# Altium PCB DDR3_SODIMM.PcbDoc
Units mm, origin at the board's own origin, x right, y up, seen from the top; angles counter-clockwise.
Board outline 68 x 30 mm, 2 copper layers (L1, L2), stack 1.595 mm thick; 1 components, 0 nets, 206 pads, 0 vias.
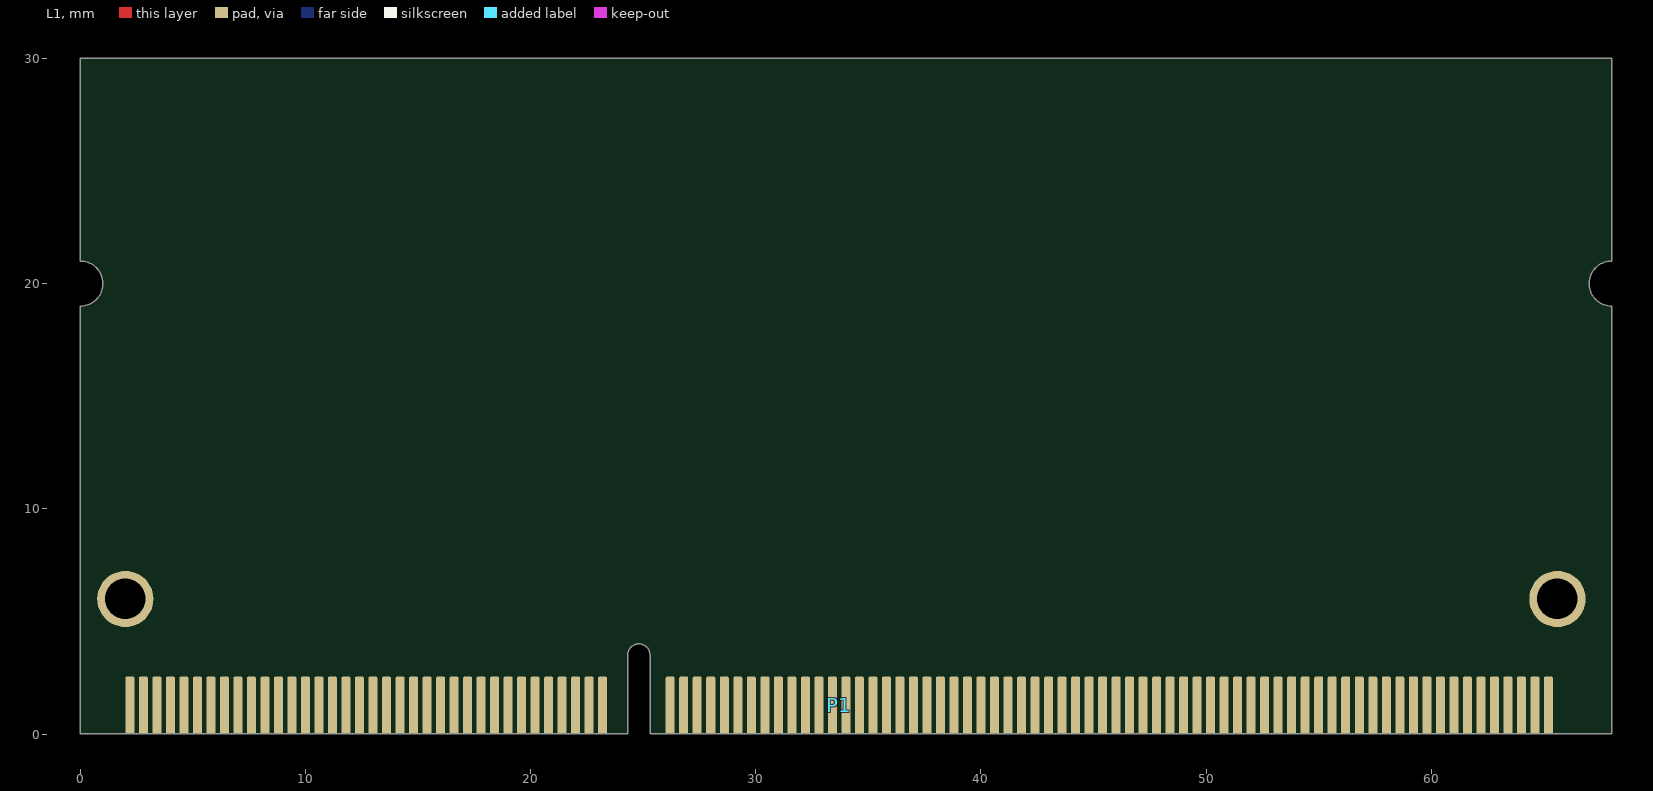
[diagram p0: L1 view]
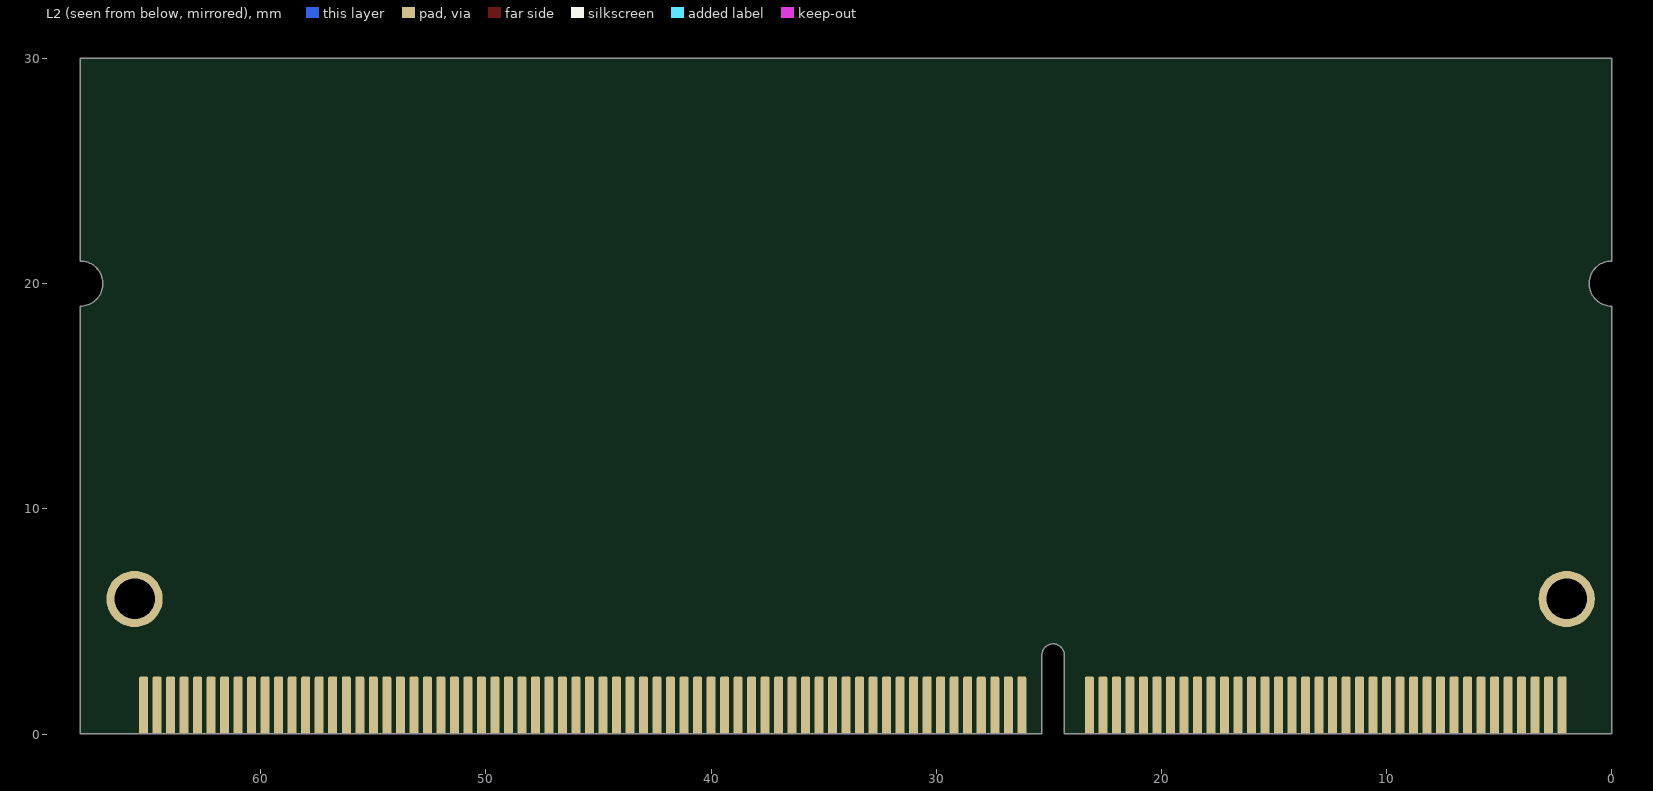
[diagram p1: L2 view, seen from below]

## Layer stack, top to bottom
Top Solder: solder mask 0.0025, Solder Resist, Dk 0
L1: signal copper 0.0356
Core: dielectric 1.524, FR-4, Dk 4.6
L2: signal copper 0.0356
Bottom Solder: solder mask 0.0025, Solder Resist, Dk 0

## Board outline
0.006,0.006 0.006,19.006 ccw(c0.006,20.006) 0.006,21.006 0.006,30.006 68.006,30.006 68.006,21.006 ccw(c68.006,20.006) 68.006,19.006 68.006,0.006 25.306,0.006 25.306,3.506 ccw(c24.806,3.506) 24.306,3.506 24.306,0.006

## Design rules (kind name [scope] priority, off if disabled: settings)
BoardOutlineClearance [All] p1: gap=0.381 ignorepadtopadclearanceinfootprint=FALSE
Clearance [All] p1: gap=0.152 ignorepadtopadclearanceinfootprint=FALSE except(0: Arc-Hole Track-Hole SMDPad-Hole THPad-Hole Via-Hole Fill-Hole Poly-Hole Region-Hole Text-Hole)
ComponentClearance [All] p1: gap=0.025 collisioncheckmode=3 verticalgap=0.025 showdistances=FALSE
DiffPairsRouting [All] p1: maxlimit=10 minlimit=0.152 mostfreqgap=0.203 toplayer_minwidth=0.152 toplayer_maxwidth=0.381 toplayer_prefwidth=0.203 bottomlayer_minwidth=0.152 bottomlayer_maxwidth=0.381 bottomlayer_prefwidth=0.203 maxuncoupledlength=12.7
HoleSize [All] p1: absolutevalues=TRUE maxlimit=6.731 minlimit=0.33 maxpercent=80.000 minpercent=20.000
HoleToHoleClearance [All] p1: gap=0.254 allowstackedmicrovias=FALSE
MinimumAnnularRing [All] p1: minimumring=0.178
MinimumSolderMaskSliver [All] p1: minsoldermaskwidth=0
PlaneClearance [All] p1: clearance=0.254
PlaneConnect [All] p1: planeconnectstyle=Direct reliefexpansion=0.406 reliefentries=4 reliefconductorwidth=0.152 reliefairgap=0.152
PolygonConnect [All] p1: connectstyle=Relief reliefconductorwidth=0.203 reliefentries=4 polygonreliefangle="90 Angle" airgapwidth=0.152
RoutingCorners [All] p1: cornerstyle=45-Degree minsetback=1.25 maxsetback=1.25
RoutingVias [All] p1: holewidth=0.381 width=0.762 viastyle="Through Hole" minholewidth=0.33 minwidth=0.686 maxholewidth=2.54 maxwidth=2.896
SilkToBoardRegionClearance [All] p1 off:
SilkToSilkClearance [All] p1: silktosilkclearance=0
SilkToSolderMaskClearance [IsPad] p1: minsilkscreentomaskgap=0.152 clearancetoexposedcopper=TRUE
SolderMaskExpansion [All] p1: expansion=0.075
Width [All] p1: maxlimit=10.16 minlimit=0.152 preferedwidth=0.203
19 further rules are at their usual default settings.

## Components (designator, comment, footprint, x,y, rotation, side; value= is the part's Value field where it differs from the comment)
P1 "SODIMM Connector" PCBComponent_1 2.2,1.275 r0 top locked

## Footprints (in the part's own frame and the unit in brackets; to place one, negate y for a bottom-side part, rotate by r counter-clockwise, add the part's x,y. Pads: shape width x height; smd on the part's side, far side on the other; paste and mask are expansions set on the pad)
PCBComponent_1 [mm]
  rrect30% 0.4x2.55 smd: 1(0,0) 3(0.6,0) 5(1.2,0) 7(1.8,0) 9(2.4,0) 11(3,0) 13(3.6,0) 15(4.2,0) 17(4.8,0) 19(5.4,0) 21(6,0) 23(6.6,0) 25(7.2,0) 27(7.8,0) 29(8.4,0) 31(9,0) 33(9.6,0) 35(10.2,0) 37(10.8,0) 39(11.4,0) 41(12,0) 43(12.6,0) 45(13.2,0) 47(13.8,0) 49(14.4,0) 51(15,0) 53(15.6,0) 55(16.2,0) 57(16.8,0) 59(17.4,0) 61(18,0) 63(18.6,0) 65(19.2,0) 67(19.8,0) 69(20.4,0) 71(21,0) 73(24,0) 75(24.6,0) 77(25.2,0) 79(25.8,0) 81(26.4,0) 83(27,0) 85(27.6,0) 87(28.2,0) 89(28.8,0) 91(29.4,0) 93(30,0) 95(30.6,0) 97(31.2,0) 99(31.8,0) 101(32.4,0) 103(33,0) 105(33.6,0) 107(34.2,0) 109(34.8,0) 111(35.4,0) 113(36,0) 115(36.6,0) 117(37.2,0) 119(37.8,0) 121(38.4,0) 123(39,0) 125(39.6,0) 127(40.2,0) 129(40.8,0) 131(41.4,0) 133(42,0) 135(42.6,0) 137(43.2,0) 139(43.8,0) 141(44.4,0) 143(45,0) 145(45.6,0) 147(46.2,0) 149(46.8,0) 151(47.4,0) 153(48,0) 155(48.6,0) 157(49.2,0) 159(49.8,0) 161(50.4,0) 163(51,0) 165(51.6,0) 167(52.2,0) 169(52.8,0) 171(53.4,0) 173(54,0) 175(54.6,0) 177(55.2,0) 179(55.8,0) 181(56.4,0) 183(57,0) 185(57.6,0) 187(58.2,0) 189(58.8,0) 191(59.4,0) 193(60,0) 195(60.6,0) 197(61.2,0) 199(61.8,0) 201(62.4,0) 203(63,0)
  rrect30% 0.4x2.55 smd far side: 2(0,0) 4(0.6,0) 6(1.2,0) 8(1.8,0) 10(2.4,0) 12(3,0) 14(3.6,0) 16(4.2,0) 18(4.8,0) 20(5.4,0) 22(6,0) 24(6.6,0) 26(7.2,0) 28(7.8,0) 30(8.4,0) 32(9,0) 34(9.6,0) 36(10.2,0) 38(10.8,0) 40(11.4,0) 42(12,0) 44(12.6,0) 46(13.2,0) 48(13.8,0) 50(14.4,0) 52(15,0) 54(15.6,0) 56(16.2,0) 58(16.8,0) 60(17.4,0) 62(18,0) 64(18.6,0) 66(19.2,0) 68(19.8,0) 70(20.4,0) 72(21,0) 74(24,0) 76(24.6,0) 78(25.2,0) 80(25.8,0) 82(26.4,0) 84(27,0) 86(27.6,0) 88(28.2,0) 90(28.8,0) 92(29.4,0) 94(30,0) 96(30.6,0) 98(31.2,0) 100(31.8,0) 102(32.4,0) 104(33,0) 106(33.6,0) 108(34.2,0) 110(34.8,0) 112(35.4,0) 114(36,0) 116(36.6,0) 118(37.2,0) 120(37.8,0) 122(38.4,0) 124(39,0) 126(39.6,0) 128(40.2,0) 130(40.8,0) 132(41.4,0) 134(42,0) 136(42.6,0) 138(43.2,0) 140(43.8,0) 142(44.4,0) 144(45,0) 146(45.6,0) 148(46.2,0) 150(46.8,0) 152(47.4,0) 154(48,0) 156(48.6,0) 158(49.2,0) 160(49.8,0) 162(50.4,0) 164(51,0) 166(51.6,0) 168(52.2,0) 170(52.8,0) 172(53.4,0) 174(54,0) 176(54.6,0) 178(55.2,0) 180(55.8,0) 182(56.4,0) 184(57,0) 186(57.6,0) 188(58.2,0) 190(58.8,0) 192(59.4,0) 194(60,0) 196(60.6,0) 198(61.2,0) 200(61.8,0) 202(62.4,0) 204(63,0)

## Free pads (board coordinates)
  round 2.5 hole 1.8: 0(2,6) 0(65.6,6)

## Nets (pads, with @x,y where several pads share a name; then routed paths per layer and width w, separated by ;. In a path a pad name is that pad's centre, name@x,y a point inside that pad or via, vN(x,y) a via of type N, cw(c..) or ccw(c..) an arc to the next point about the centre after c; other vN are vias at no path point)
pads on no net: P1.1 P1.2 P1.3 P1.4 P1.5 P1.6 P1.7 P1.8 P1.9 P1.10 P1.11 P1.12 P1.13 P1.14 P1.15 P1.16 P1.17 P1.18 P1.19 P1.20 P1.21 P1.22 P1.23 P1.24 P1.25 P1.26 P1.27 P1.28 P1.29 P1.30 P1.31 P1.32 P1.33 P1.34 P1.35 P1.36 P1.37 P1.38 P1.39 P1.40 P1.41 P1.42 P1.43 P1.44 P1.45 P1.46 P1.47 P1.48 P1.49 P1.50 P1.51 P1.52 P1.53 P1.54 P1.55 P1.56 P1.57 P1.58 P1.59 P1.60 P1.61 P1.62 P1.63 P1.64 P1.65 P1.66 P1.67 P1.68 P1.69 P1.70 P1.71 P1.72 P1.73 P1.74 P1.75 P1.76 P1.77 P1.78 P1.79 P1.80 P1.81 P1.82 P1.83 P1.84 P1.85 P1.86 P1.87 P1.88 P1.89 P1.90 P1.91 P1.92 P1.93 P1.94 P1.95 P1.96 P1.97 P1.98 P1.99 P1.100 P1.101 P1.102 P1.103 P1.104 P1.105 P1.106 P1.107 P1.108 P1.109 P1.110 P1.111 P1.112 P1.113 P1.114 P1.115 P1.116 P1.117 P1.118 P1.119 P1.120 P1.121 P1.122 P1.123 P1.124 P1.125 P1.126 P1.127 P1.128 P1.129 P1.130 P1.131 P1.132 P1.133 P1.134 P1.135 P1.136 P1.137 P1.138 P1.139 P1.140 P1.141 P1.142 P1.143 P1.144 P1.145 P1.146 P1.147 P1.148 P1.149 P1.150 P1.151 P1.152 P1.153 P1.154 P1.155 P1.156 P1.157 P1.158 P1.159 P1.160 P1.161 P1.162 P1.163 P1.164 P1.165 P1.166 P1.167 P1.168 P1.169 P1.170 P1.171 P1.172 P1.173 P1.174 P1.175 P1.176 P1.177 P1.178 P1.179 P1.180 P1.181 P1.182 P1.183 P1.184 P1.185 P1.186 P1.187 P1.188 P1.189 P1.190 P1.191 P1.192 P1.193 P1.194 P1.195 P1.196 P1.197 P1.198 P1.199 P1.200 P1.201 P1.202 P1.203 P1.204

## Silkscreen, mask and mechanical layers (free items; w line width, h text height)
Top Solder:
  rectangle: 1,0 66,3
Bottom Solder:
  rectangle: 1,0 66,3
Mechanical 29:
  lines w0.05: 0.006,19.006 0.006,0.006 24.306,0.006 24.306,3.506 ; 0.006,21.006 0.006,30.006 68.006,30.006 68.006,21.006 ; 25.306,3.506 25.306,0.006 68.006,0.006 68.006,19.006